# Altium PCB Sitara_Project_Rev_A_PCB.PcbDoc (part 7 of 9)
Units mm, origin at the board's own origin, x right, y up, seen from the top; angles counter-clockwise.
Board outline 120 x 85 mm, 8 copper layers (L1 (Sig), L2 (GND), L3 (PWR), L4 (Sig), L5 (GND), L6 (Sig), L7 (GND), L8 (Sig)), stack 1.188 mm thick; 458 components, 357 nets, 1916 pads, 1164 vias.
Unrouted connection lines stored in the file: 516.
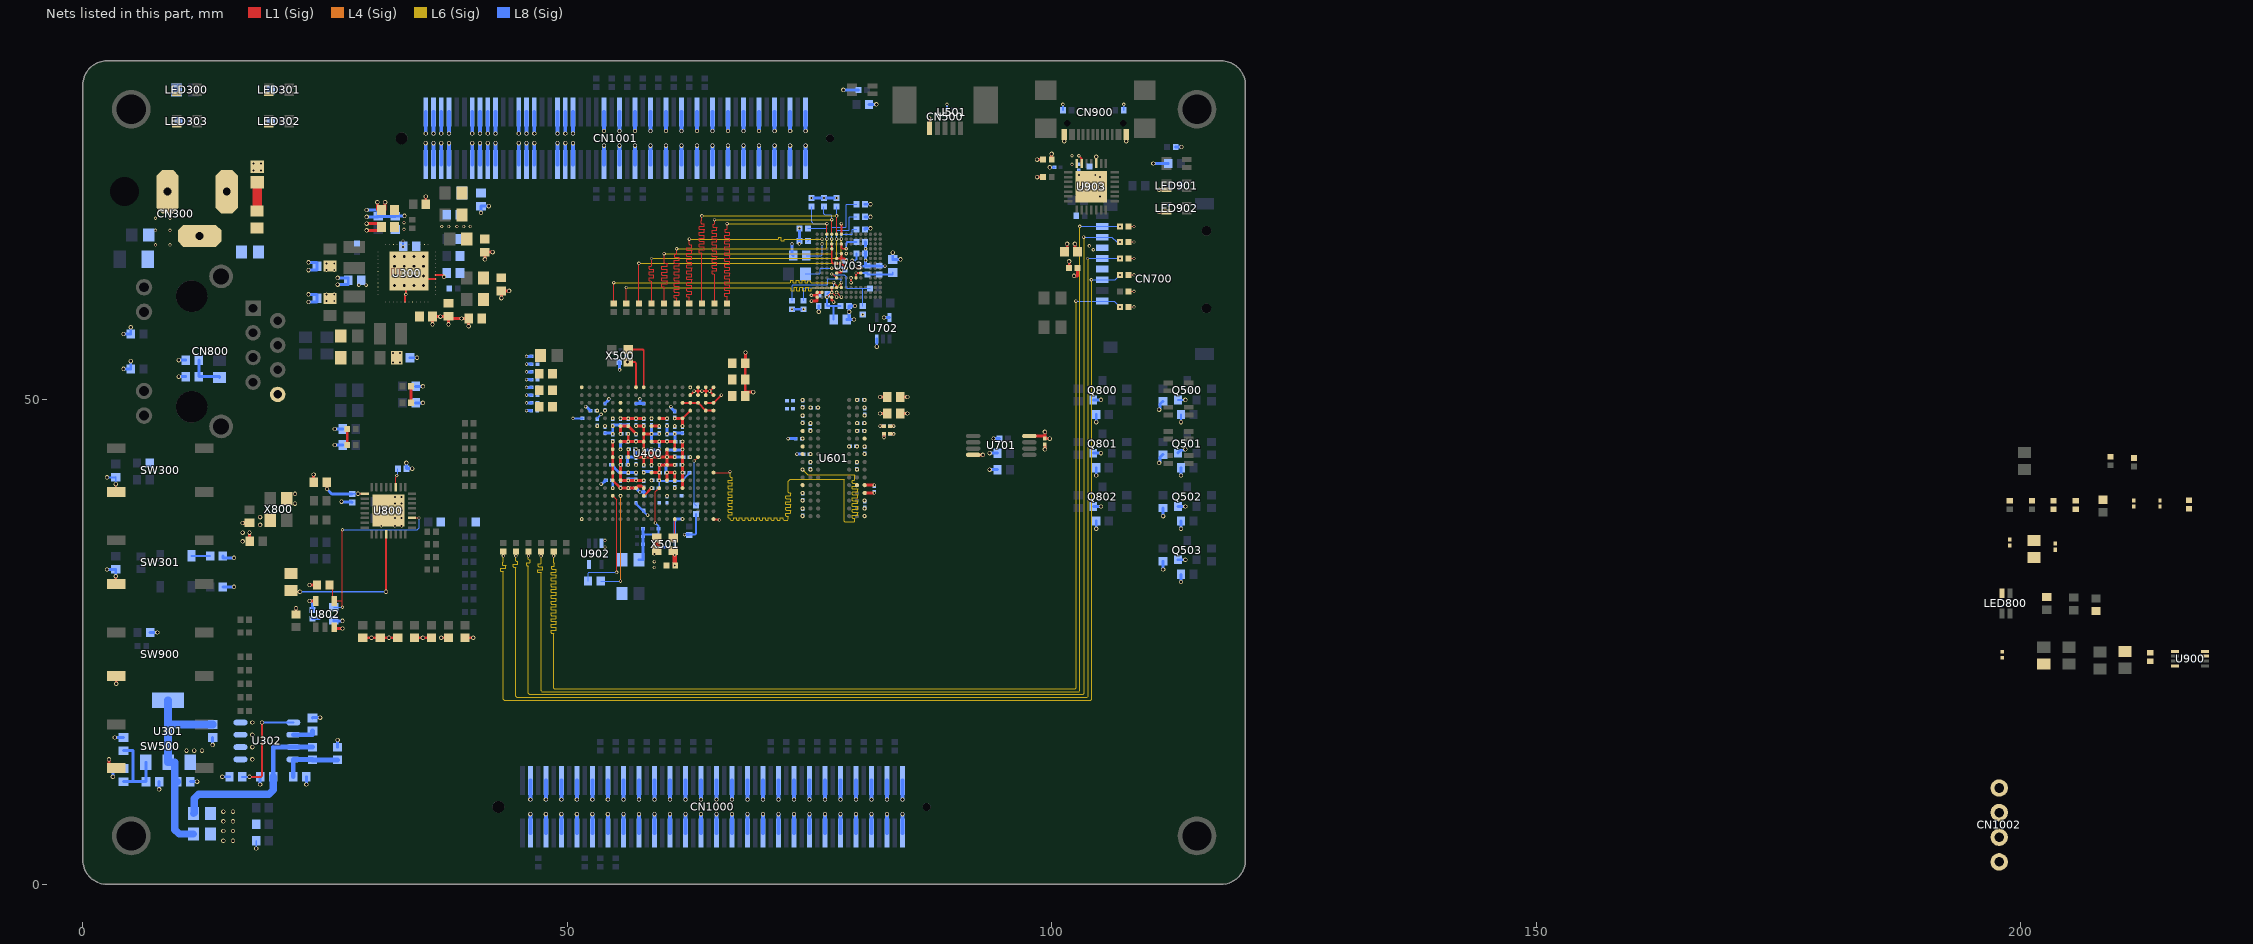
[diagram p10: the nets of this part, all layers, seen from the top]

## Via types
v1: diameter 0.35, hole 0.2, L1 (Sig) to L8 (Sig), tented both sides, 846 vias
v2: diameter 0.45, hole 0.3, L1 (Sig) to L8 (Sig), tented both sides, 302 vias
v3: diameter 0.45/0.45/0.45/0.45/0.45/0.45/0.45/0.45 (per signal layer), hole 0.3, L1 (Sig) to L8 (Sig), tented both sides, 16 vias

## Nets (pads, with @x,y where several pads share a name; then routed paths per layer and width w, separated by ;. In a path a pad name is that pad's centre, name@x,y a point inside that pad or via, vN(x,y) a via of type N, cw(c..) or ccw(c..) an arc to the next point about the centre after c; other vN are vias at no path point) (continued)
DDR_ODT: U400.G1 U601.K1 | length 58.5
  L1 (Sig) w0.1: U400.G1@65.1,42.5 66.7,42.5 v1(66.8,42.6)
  L6 (Sig) w0.1: v1(66.8,42.6) 66.8,42.2 66.8,42.087 66.859,42.029 67.02,42.029 67.05,41.999 67.05,41.759 67.02,41.729 66.644,41.729 66.614,41.699 66.614,41.459 66.644,41.429 67.02,41.429 67.05,41.399 67.05,41.159 67.02,41.129 66.644,41.129 66.614,41.099 66.614,40.859 66.644,40.829 67.02,40.829 67.05,40.799 67.05,40.559 67.02,40.529 66.644,40.529 66.614,40.499 66.614,40.259 66.644,40.229 67.02,40.229 67.05,40.199 67.05,39.959 67.02,39.929 66.644,39.929 66.614,39.899 66.614,39.659 66.644,39.629 67.02,39.629 67.05,39.599 67.05,39.359 67.02,39.329 66.644,39.329 66.614,39.299 66.614,39.059 66.644,39.029 67.02,39.029 67.05,38.999 67.05,38.759 67.02,38.729 66.644,38.729 66.614,38.699 66.614,38.459 66.644,38.429 67.02,38.429 67.05,38.399 67.05,38.159 67.02,38.129 66.644,38.129 66.614,38.099 66.614,37.859 66.644,37.829 66.741,37.829 66.8,37.77 66.8,37.72 66.8,37.659 66.859,37.6 67.005,37.6 67.112,37.6 67.171,37.659 67.171,37.82 67.201,37.85 67.441,37.85 67.471,37.82 67.471,37.607 67.501,37.577 67.741,37.577 67.771,37.607 67.771,37.82 67.801,37.85 68.041,37.85 68.071,37.82 68.071,37.607 68.101,37.577 68.341,37.577 68.371,37.607 68.371,37.82 68.401,37.85 68.641,37.85 68.671,37.82 68.671,37.607 68.701,37.577 68.941,37.577 68.971,37.607 68.971,37.82 69.001,37.85 69.241,37.85 69.271,37.82 69.271,37.607 69.301,37.577 69.541,37.577 69.571,37.607 69.571,37.82 69.601,37.85 69.841,37.85 69.871,37.82 69.871,37.607 69.901,37.577 70.141,37.577 70.171,37.607 70.171,37.82 70.201,37.85 70.441,37.85 70.471,37.82 70.471,37.607 70.501,37.577 70.741,37.577 70.771,37.607 70.771,37.82 70.801,37.85 71.041,37.85 71.071,37.82 71.071,37.607 71.101,37.577 71.341,37.577 71.371,37.607 71.371,37.82 71.401,37.85 71.641,37.85 71.671,37.82 71.671,37.607 71.701,37.577 71.941,37.577 71.971,37.607 71.971,37.82 72.001,37.85 72.241,37.85 72.271,37.82 72.271,37.659 72.329,37.6 72.679,37.6 72.741,37.6 72.8,37.659 72.8,37.9 72.8,37.95 72.741,38.009 72.58,38.009 72.55,38.039 72.55,38.279 72.58,38.309 73.02,38.309 73.05,38.339 73.05,38.579 73.02,38.609 72.58,38.609 72.55,38.639 72.55,38.879 72.58,38.909 73.02,38.909 73.05,38.939 73.05,39.179 73.02,39.209 72.58,39.209 72.55,39.239 72.55,39.479 72.58,39.509 73.02,39.509 73.05,39.539 73.05,39.779 73.02,39.809 72.58,39.809 72.55,39.839 72.55,40.079 72.58,40.109 73.02,40.109 73.05,40.139 73.05,40.379 73.02,40.409 72.859,40.409 72.8,40.467 72.8,40.773 72.8,41.6 72.9,41.7 73,41.8 78.541,41.8 78.6,41.741 78.6,37.459 78.659,37.4 79.6,37.4 79.7,37.5 79.7,37.7 79.7,37.75 79.641,37.809 79.464,37.809 79.434,37.839 79.434,38.079 79.464,38.109 79.965,38.109 79.995,38.139 79.995,38.379 79.965,38.409 79.464,38.409 79.434,38.439 79.434,38.679 79.464,38.709 79.965,38.709 79.995,38.739 79.995,38.979 79.965,39.009 79.464,39.009 79.434,39.039 79.434,39.279 79.464,39.309 79.965,39.309 79.995,39.339 79.995,39.579 79.965,39.609 79.464,39.609 79.434,39.639 79.434,39.879 79.464,39.909 79.965,39.909 79.995,39.939 79.995,40.179 79.965,40.209 79.464,40.209 79.434,40.239 79.434,40.479 79.464,40.509 79.965,40.509 79.995,40.539 79.995,40.779 79.965,40.809 79.464,40.809 79.434,40.839 79.434,41.079 79.464,41.109 79.965,41.109 79.995,41.139 79.995,41.379 79.965,41.409 79.464,41.409 79.434,41.439 79.434,41.679 79.464,41.709 79.641,41.709 79.7,41.767 79.7,41.998 79.7,42.241 79.641,42.3 74.8,42.3 v1(74.3,42.8)
DDR_VREF: C600.1 C601.1 C602.1 C625.2 R602.1 R603.1 U400.J4 U601.H1 U601.M8
  other v1: 62.7,44.1
DDR_VTP: R605.1 U400.J3 | length 5.2
  L1 (Sig) w0.1: v1(63.1,43.7) U400.J3@63.5,44.1
  L8 (Sig) w0.1: v1(63.1,43.7) 63.1,39.3 R605.1@63.3,39.1
DGND: C300.1 C301.1 C302.1 C303.1 C304.2 C305.1 C306.1 C307.1 C308.1 C309.1 C310.1 C311.1 C312.1 C313.1 C314.1 C315.1 C316.1 C317.1 C318.1 C319.1 C320.1 C321.1 C322.1 C323.1 C324.1 C325.1 C326.1 C327.1 C328.1 C329.1 C400.2 C401.2 C402.1 C403.1 C404.1 C405.1 C406.1 C407.1 C408.1 C409.1 C410.1 C411.1 C412.2 C413.2 C414.1 C415.1 C416.1 C417.1 C418.1 C419.1 C420.1 C421.1 C422.1 C423.1 C424.1 C425.1 C426.1 C427.1 C428.1 C429.1 C430.1 C431.1 C432.1 C433.1 C434.1 C435.1 C436.1 C437.1 C438.1 C439.1 C440.1 C441.1 C442.1 C443.1 C444.1 C445.1 C446.1 C447.1 C448.1 C449.1 C450.1 C451.1 C452.1 C453.1 C454.1 C455.1 C456.1 C457.1 C458.1 C459.1 C460.1 C461.1 C462.1 C463.1 C464.1 C465.1 C466.1 C467.1 C468.1 C469.1 C470.1 C471.1 C472.1 C473.1 C500.2 C600.2 C601.2 C602.2 C603.1 C604.1 C605.1 C606.1 C607.1 C608.1 C609.1 C610.1 C611.1 C612.1 C613.1 C614.1 C615.1 C616.1 C617.1 C618.1 C619.1 C620.1 C621.1 C622.1 C623.1 C624.1 C625.1 C700.2 C701.2 C702.2 C703.2 C704.1 C705.1 C706.1 C707.1 C708.1 C709.1 C710.1 C711.1 C712.1 C713.1 C714.1 C800.2 C801.2 C802.2 C803.2 C804.2 C805.1 C806.1 C807.1 C808.1 C809.1 C810.1 C811.1 C812.1 C813.2 C814.2 C900.2 C901.2 C902.1 C903.2 C904.2 C905.2 CN500.5 CN700.6 CN800.8 CN900.A1 CN900.B1 CN1000.3 CN1000.4 CN1000.7 CN1000.8 CN1000.11 CN1000.12 CN1000.15 CN1000.16 CN1000.19 CN1000.20 CN1000.23 CN1000.24 CN1000.27 CN1000.28 CN1000.31 CN1000.32 CN1000.35 CN1000.36 CN1000.39 CN1000.40 CN1000.43 CN1000.44 CN1000.47 CN1000.48 CN1000.51 CN1000.52 CN1000.55 CN1000.56 CN1000.59 CN1000.60 CN1000.63 CN1000.64 CN1000.67 CN1000.68 CN1000.71 CN1000.72 CN1000.75 CN1000.76 CN1000.79 CN1000.80 CN1000.83 CN1000.84 CN1000.87 CN1000.88 CN1000.91 CN1000.92 CN1000.95 CN1000.96 CN1000.99 CN1000.100 CN1001.13 CN1001.14 CN1001.15 CN1001.16 CN1001.17 CN1001.18 CN1001.19 CN1001.20 CN1001.47 CN1001.48 CN1001.51 CN1001.52 CN1001.55 CN1001.56 CN1001.59 CN1001.60 CN1001.63 CN1001.64 CN1001.67 CN1001.68 CN1001.71 CN1001.72 CN1001.75 CN1001.76 CN1001.79 CN1001.80 CN1001.83 CN1001.84 CN1001.87 CN1001.88 CN1001.91 CN1001.92 CN1001.95 CN1001.96 CN1001.99 CN1001.100 CN1002.4 FB400.1 Q500.2 Q501.2 Q502.2 Q503.2 Q800.2 Q801.2 Q802.2 R301.2 R305.2 R306.1 R307.2 R309.2 R318.1 R331.1 R333.1 R334.1 R400.2 R401.1 R519.2 R520.2 R521.2 R535.1 R538.2 R542.2 R547.2 R551.2 R555.2 R601.2 R603.2 R604.2 R605.2 R819.2 R823.1 R824.1 R829.2 R830.2 R831.2 R832.2 R847.2 R849.1 R850.1 R851.2 R853.2 R904.1 R905.1 R906.1 R907.2 SW300.3 SW301.3 SW500.3 SW900.3 U300.30 U300.41 U300.49 U301.1 U302.5 U302.6 U302.7 U302.8 U400.A1 U400.A18 U400.F8 U400.G8 U400.G9 U400.G11 U400.G12 U400.H6 U400.H7 U400.H8 U400.H9 U400.H10 U400.H12 U400.J6 U400.J7 U400.J8 U400.J9 U400.J10 U400.J11 U400.K7 U400.K9 U400.K10 U400.K11 U400.L10 U400.L11 U400.L12 U400.L13 U400.M6 U400.M7 U400.M8 U400.M9 U400.M10 U400.M12 U400.M14 U400.N7 U400.N10 U400.N11 U400.N14 U400.R1 U400.R2 U400.T3 U400.T4 U400.T5 U400.U1 U400.U2 U400.U3 U400.U4 U400.V1 U400.V2 U400.V3 U400.V18 U501.4 U601.A9 U601.B1 U601.B3 U601.B9 U601.D1 U601.D8 U601.E1 U601.E2 U601.E8 U601.F9 U601.G1 U601.G8 U601.G9 U601.J2 U601.J8 U601.M1 U601.M9 U601.P1 U601.P9 U601.T1 U601.T9 U701.4 U702.3 U703.A6 U703.C4 U703.D4 U703.E7 U703.G5 U703.H10 U703.J5 U703.K8 U703.N1 U703.N2 U703.N5 U703.P1 U703.P4 U703.P6 U800.33 U802.3 U900.1 U900.4 U902.3 U903.3 U903.29 X800.2 X800.4 | length 369.9
  L1 (Sig) w0.1: v1(77.8,61.1) v1(78.3,60.6)
  L1 (Sig) w0.2: SW500.3@2.7,12.4 3.1,12 SW500.3@3.45,12 ; SW301.3@3.4,31.05 SW301.3@3.45,31 ; v2(3.4,41.3) 3.4,40.55 SW300.3@3.45,40.5 ; v3(33.175,61.8) 33.35,61.8 v1(33.35,60.9) 33.25,60.9 U300.30@33.25,60.1 ; v3(35.175,62.8) 35.175,62.475 U300.41@36.425,62.475 ; U400.T5@61.9,49.7 61.902,49.702 62.698,49.702 U400.T4@62.7,49.7 U400.T3@63.5,49.7 U400.R2@64.3,48.9 U400.R1@65.1,48.9 ; U400.U4@62.7,50.5 v1(63.1,50.9) 63.5,50.9 ; U400.U3@63.5,50.5 63.5,50.9 ; U400.V3@63.5,51.3 63.5,50.9 ; U400.U2@64.3,50.5 64.3,50.9 ; U400.V2@64.3,51.3 64.3,50.9 ; U400.A1@65.1,37.7 65.138,37.662 65.598,37.662 65.659,37.6 v1(65.7,37.6) ; U400.U1@65.1,50.5 v1(64.7,50.9) ; U400.V1@65.1,51.3 v1(64.7,50.9) ; U703.C4@77.3,66.1 U703.D4@77.3,65.6 77.3,64.217 77.417,64.1 U703.G5@77.8,64.1 77.803,64.097 78.303,64.097 v1(78.8,63.6) ; U703.J5@77.8,63.1 77.829,63.129 78.229,63.129 78.3,63.2 v1(78.3,63.4) ; U703.A6@78.3,67.1 v1(78.3,68.2) ; v1(79.3,62.1) v1(79.3,62.6) ; CN500.5@87.4,78.05 v1(87.4,79.1) ; v2(101.3,76.7) CN900.B1@101.3,77.4 ; U903.3@104.6,74.4 v2(104.6,75.1) ; 63.5,50.9 v1(63.9,50.9) 64.3,50.9 ; 64.3,50.9 v1(64.7,50.9)
  L1 (Sig) w0.25: U703.P4@77.3,60.6 77.319,60.581 77.319,60.308 77.5,60.127 v1(77.5,60.1) ; v1(79.8,63.8) 79.827,63.8 80.008,63.619 80.281,63.619 U703.H10@80.3,63.6 ; C701.2@101.325,65.3 101.6,65.3 v2(101.6,66.1) ; C702.2@101.795,63.6 101.8,63.6 v2(101.8,64.3)
  L1 (Sig) w0.3: SW500.3@2.7,12.4 v2(2.7,12.9) ; SW301.3@3.4,31.05 v2(3.4,31.8) ; v2(3.45,20.7) SW900.3@3.45,21.5 ; v2(16.5,37.3) 17.175,37.3 C806.1@17.2,37.325 ; v2(17.2,36.3) 17.2,35.425 C805.1@17.225,35.4 ; C800.2@23.825,41.5 v2(23.825,42.3) ; U802.3@25.95,26.55 25.95,26.4 v2(26.8,26.4) ; v2(29.3,67.5) 30.525,67.5 30.825,67.8 C314.1@30.825,67.85 30.825,67.9 30.525,68.2 v2(29.3,68.2) ; v2(30.4,70.4) 30.4,69.6 C313.1@30.825,69.6 31.2,69.6 v2(31.2,70.4) ; R829.2@34.25,25.45 v2(35.1,25.45) R830.2@36,25.45 ; R307.2@35.4,70.2 v2(35.4,71) ; v2(36.1,57.8) C319.1@36.1,58.6 v2(36.9,58.6) C320.1@37.75,58.6 ; v2(37.75,57.8) C320.1@37.75,58.6 ; R832.2@39.46,25.45 v2(40.3,25.45) ; v2(39.825,57.6) C328.1@39.825,58.4 v2(39.1,58.4) 37.75,58.4 C320.1@37.75,58.6 ; v2(41.5,64.5) C327.1@41.5,65.25 v2(42.3,65.25) ; v2(43.2,60.5) C329.1@43.2,61.25 v2(44,61.25) ; U400.L13@55.5,45.7 v1(56.3,45.7) ; v1(56.3,46.5) v1(56.3,45.7) ; v1(57.1,44.1) v1(57.9,44.1) ; v1(57.1,47.3) v1(57.9,47.3) U400.M10@57.9,46.5 ; v1(57.9,43.3) v1(57.9,44.1) ; U400.G9@58.7,42.5 v1(59.5,42.5) ; v1(58.7,43.3) v1(58.7,44.1) ; U400.K9@58.7,44.9 v1(58.7,44.1) ; v1(58.7,46.5) U400.M10@57.9,46.5 ; v1(59.5,41.7) v1(59.5,42.5) ; U400.K7@60.3,44.9 v1(60.3,44.1) ; v1(61.1,43.3) U400.H7@60.3,43.3 ; v1(61.1,44.1) v1(60.3,44.1) ; C448.1@68.375,50.4 C448.1@68.375,50.8 ; v2(68.4,54.9) 68.4,53.8 C420.1@68.375,53.8 C449.1@68.375,52.1 C448.1@68.375,50.8 ; v2(69.2,50.8) C448.1@68.375,50.8 ; v1(75.2,60.2) 75.8,60.2 U703.P1@75.8,60.6 75.8,60.85 ; v1(75.2,60.8) 75.8,60.8 75.8,60.85 ; U703.N2@76.3,61.1 U703.N1@75.8,61.1 75.8,60.85 ; U601.M9@80.7,41.2 v1(81.7,41.2) ; C622.1@83.31,46.5 v1(83.7,46.5) ; C623.1@83.31,47.3 v1(83.7,47.3) ; C465.1@84.375,48.6 v2(85.1,48.6) ; C464.1@84.375,50.3 v2(85.1,50.3) ; U701.4@91.9,44.325 v2(92.9,44.325) ; v2(98.5,74.8) C903.2@99.12,74.8 ; v2(99.3,44.9) C700.2@99.3,45.39 ; v2(107.7,76.7) CN900.A1@107.7,77.4 ; v1(56.3,45.7) v1(57.1,45.7) U400.L10@57.9,45.7 ; v1(57.9,44.1) U400.K10@57.9,44.9 U400.L10@57.9,45.7 ; v1(57.9,44.1) v1(58.7,44.1) ; U400.L10@57.9,45.7 U400.M10@57.9,46.5 ; v1(58.7,44.1) v1(59.5,44.1) v1(60.3,44.1) ; v1(59.5,42.5) v1(59.5,43.3) U400.H7@60.3,43.3 ; U400.H7@60.3,43.3 v1(60.3,44.1)
  L8 (Sig) w0.2: v2(2.5,42) 3.4,42 C301.1@3.4,42.025 v2(3.4,41.3) ; C302.1@3.4,32.5 C302.1@3.4,32.525 ; v2(17.9,3.7) R535.1@17.9,4.5 ; v1(50.6,48.1) R521.2@51.575,48.1 ; C403.1@53.1,48.1 v1(53.5,48.5) ; C412.2@57.1,39.38 57.125,39.355 57.125,39.256 v1@58.272,38.11 ; C401.2@57.9,38.59 C401.2@57.9,38.6 ; C404.1@59.42,40.9 59.425,40.9 59.5,40.975 v1(59.5,41.7) 59.541,41.7 59.631,41.61 C410.1@60.3,41.61 60.305,41.615 61.095,41.615 C426.1@61.1,41.62 61.82,41.62 62.51,42.31 62.51,42.425 62.585,42.5 C472.1@62.61,42.5 ; R538.2@62.57,36.09 63.183,36.09 63.3,36.208 R605.2@63.3,38.22 ; v1(78.3,63.4) 78.6,63.4 v1(78.8,63.6) ; U501.4@89.2,80 v1(89.2,80.5) ; v2(99.8,74) C902.1@100.28,74 ; R905.1@101.16,79.9 v1(101.16,80.5) ; v1(102.8,73.2) C905.2@102.8,73.7 ; C904.2@103.9,73.22 v1(104.5,73.22) ; R906.1@107.44,79.9 v1(107.44,80.5) ; Q500.2@113.05,50 v2(113.8,50) ; v2(113.35,47.7) R542.2@113.35,48.5
  L8 (Sig) w0.25: v1(79.8,63.8) 81,63.8 C708.1@81,63.84
  L8 (Sig) w0.3: v2(2.5,32.5) C302.1@3.4,32.5 ; v2(3.1,11.1) 3.1,11.8 3.25,11.95 C306.1@4.2,11.95 ; v2(3.3,15.15) C305.1@4.2,15.15 ; v2(3.4,31.8) C302.1@3.4,32.525 ; v2(4.2,53.2) R850.1@4.95,53.2 v2(4.95,54) ; v2(4.2,56.8) R849.1@4.95,56.8 v2(4.95,57.5) ; v2(7.875,9.8) C307.1@7.875,10.6 ; v2(9.9,52.4) C814.2@10.625,52.4 ; v2(9.9,54.1) C813.2@10.625,54.1 ; C308.1@11.1,10.6 v2(11.8,10.6) ; v2(13.4,14.4) C309.1@13.4,15.15 ; R301.2@14.45,30.7 v2(15.6,30.7) ; R305.2@14.45,33.9 14.45,33.7 v2(15.6,33.7) ; v2(18.3,10.3) C311.1@18.3,11.1 ; v2(23.075,10.3) C312.1@23.075,11.1 ; v2(23.3,60.1) 24.175,60.1 C324.1@24.175,60.5 24.175,60.9 v2(23.3,60.9) ; v2(23.3,63.4) 24.175,63.4 C323.1@24.175,63.8 24.175,64.2 v2(23.3,64.2) ; C310.1@23.7,17.175 23.725,17.2 v2(24.5,17.2) ; C808.1@23.7,27.42 24.4,27.42 v2(24.4,27.6) ; C807.1@25.9,27.25 25.9,27.2 v2(26.8,27.2) ; v2(26,45.35) C811.1@26.825,45.35 ; v2(26,47) C812.1@26.825,47 ; R333.1@26.3,14.15 v2(26.3,14.9) ; v2(26.3,61.9) 27.4,61.9 C317.1@27.4,62.35 27.4,62.6 v2(26.3,62.6) ; v2(26.7,39.5) 26.729,39.471 27.749,39.471 C801.2@27.8,39.42 ; v2(29.3,68.9) 30.45,68.9 30.45,69.6 v2(29.3,69.6) ; C322.1@30.5,68.95 C315.1@32.25,68.95 32.25,69 v2(33.2,69) ; v2(33.4,43.5) C802.2@33.4,42.9 v2(34,42.9) ; C325.1@33.76,54.35 v2(34.5,54.35) ; C809.1@34.35,49.7 v2(35.1,49.7) ; C810.1@34.35,51.4 v2(35.1,51.4) ; v2(41.1,69.3) C326.1@41.1,70 v2(41.9,70) ; v1(45.8,48.9) C429.1@46.29,48.9 ; v1(45.8,49.7) C430.1@46.3,49.7 ; v1(45.8,50.5) C431.1@46.3,50.5 ; v1(45.8,51.3) C432.1@46.3,51.3 ; v1(45.8,52.1) C433.1@46.3,52.1 ; v1(45.8,52.9) C434.1@46.3,52.9 ; v1(45.8,53.7) C435.1@46.3,53.7 ; v1(45.8,54.5) C408.1@46.3,54.5 ; v1(51.9,49.3) 51.91,49.29 51.975,49.29 52.365,48.9 C402.1@52.4,48.9 ; v1(53.5,41.3) 53.51,41.31 53.575,41.31 53.965,41.7 C473.1@53.99,41.7 ; C442.1@53.9,46.6 54.535,46.6 54.7,46.435 C443.1@54.7,46.41 ; C436.1@53.9,49.61 53.9,49.635 54.29,50.025 54.29,50.09 v1(54.3,50.1) ; C407.1@54.51,43.3 54.535,43.3 55.335,42.5 55.5,42.5 ; v1(54.7,46.5) v1(54.7,47.3) 54.8,47.4 C441.1@55.5,47.4 C440.1@56.3,47.4 ; R400.2@55.36,53.9 55.39,53.87 55.39,53.11 v1(55.4,53.1) ; C444.1@55.5,41.6 55.5,42.5 ; v1(56.3,43.3) 56.2,43.4 C415.1@56.2,44.1 v1(57.1,44.1) v1(57.1,44.9) ; C445.1@57,40.9 57.025,40.875 57.125,40.875 v1@57.49,40.51 ; v1(57.1,42.5) v1(56.3,42.5) 55.5,42.5 ; C405.1@57.1,49.61 57.5,49.61 ; v1(57.5,40.5) 57.9,40.5 ; v1(57.5,50.1) 57.5,49.61 ; C417.1@57.9,40.99 57.9,40.5 ; C406.1@57.9,49.61 57.5,49.61 ; C413.2@57.99,40.1 57.99,40.5 57.9,40.5 ; C423.1@58.7,47.4 v1(58.7,46.5) ; C452.1@58.8,45.7 58.775,45.7 58.75,45.725 58.75,45.75 58.7,45.8 v1(58.7,46.5) ; v1(59.5,46.5) v1(58.7,46.5) ; v1(60.3,47.3) v1(60.3,46.5) v1(61.1,46.5) ; v1(60.7,49.3) 60.71,49.29 60.71,49.19 61.05,48.85 61.075,48.85 61.1,48.825 C437.1@61.1,48.8 ; v1(61.1,44.1) C625.1@61.99,44.1 ; C469.1@61.19,45.7 61.165,45.7 61.14,45.725 61.14,46.325 61.1,46.365 v1(61.1,46.5) ; C446.1@61.9,46.6 61.2,46.6 v1(61.1,46.5) ; v1(62.1,36.1) 62.11,36.09 R538.2@62.57,36.09 ; v1(72.8,46) C618.1@73.59,46 ; v1(73.2,66.1) 73.2,65.025 C709.1@73.325,64.9 ; v1(73.7,44.4) C619.1@74.39,44.4 ; v2(75.96,59.1) C713.1@75.96,59.7 ; v2(78.5,82) C500.2@80.06,82 ; v2(79.6,58.3) C710.1@78.85,58.3 79.1,58.3 v2(79.1,59.1) 79.1,59.7 C712.1@79.08,59.7 v2(79.7,59.7) ; C707.1@80.74,65.1 C707.1@80.8,65.1 ; C711.1@80.74,66.3 80.8,66.3 v1(80.8,65.6) C707.1@80.8,65.1 ; R520.2@81.15,80.5 v2(81.9,80.5) ; v2(81.95,55.5) U702.3@81.95,56.3 ; v1(82.8,63.8) 82.2,63.8 C706.1@82.2,63.84 C708.1@81,63.84 80.8,63.84 v1(80.8,64.4) C707.1@80.8,65.1 ; C614.1@83.31,46.5 v1(83.7,46.5) ; C621.1@83.31,47.3 v1(83.7,47.3) ; v2(83.6,65.2) C704.1@83.6,64.5 v2(84.4,64.5) ; Q802.2@104.3,39 v2(105.1,39) ; Q801.2@104.3,44.5 v2(105.1,44.5) ; Q800.2@104.3,50 v2(105.1,50) ; v2(104.6,36.7) R853.2@104.6,37.5 ; v2(104.6,42.2) R851.2@104.6,43 ; v2(104.6,47.7) R847.2@104.6,48.5 ; v2(110.5,74.4) R907.2@112.038,74.4 ; C901.2@112.8,76.1 v2(113.4,76.1) ; Q503.2@113.05,33.5 v2(113.8,33.5) ; Q502.2@113.05,39 v2(113.8,39) ; Q501.2@113.05,44.5 113.05,44.55 113.3,44.8 113.659,44.8 113.759,44.9 v2(113.8,44.9) ; v2(113.35,31.2) R555.2@113.35,32 ; v2(113.35,36.7) R551.2@113.35,37.5 ; v2(113.35,42.2) R547.2@113.35,43
  L8 (Sig) w0.4: CN1001.14@40.2,74.3 v2(40.2,76.5) ; v2(40.2,77.5) CN1001.13@40.2,79.7 ; CN1001.16@41,74.3 v2(41,76.5) ; v2(41,77.5) CN1001.15@41,79.7 ; CN1001.18@41.8,74.3 v2(41.8,76.5) ; v2(41.8,77.5) CN1001.17@41.8,79.7 ; CN1001.20@42.6,74.3 v2(42.6,76.5) ; v2(42.6,77.5) CN1001.19@42.6,79.7 ; CN1000.4@46.2,5.3 v2(46.2,7.25) ; v2(46.2,8.75) CN1000.3@46.2,10.7 ; CN1000.8@47.8,5.3 v2(47.8,7.25) ; v2(47.8,8.75) CN1000.7@47.8,10.7 ; CN1000.12@49.4,5.3 v2(49.4,7.25) ; v2(49.4,8.75) CN1000.11@49.4,10.7 ; CN1000.16@51,5.3 v2(51,7.25) ; v2(51,8.75) CN1000.15@51,10.7 ; CN1000.20@52.6,5.3 v2(52.6,7.25) ; v2(52.6,8.75) CN1000.19@52.6,10.7 ; CN1001.48@53.8,74.3 v2(53.8,76.25) ; v2(53.8,77.75) CN1001.47@53.8,79.7 ; CN1000.24@54.2,5.3 v2(54.2,7.25) ; v2(54.2,8.75) CN1000.23@54.2,10.7 ; CN1001.52@55.4,74.3 v2(55.4,76.25) ; v2(55.4,77.75) CN1001.51@55.4,79.7 ; CN1000.28@55.8,5.3 v2(55.8,7.25) ; v2(55.8,8.75) CN1000.27@55.8,10.7 ; CN1001.56@57,74.3 v2(57,76.25) ; v2(57,77.75) CN1001.55@57,79.7 ; CN1000.32@57.4,5.3 v2(57.4,7.25) ; v2(57.4,8.75) CN1000.31@57.4,10.7 ; CN1001.60@58.6,74.3 v2(58.6,76.25) ; v2(58.6,77.75) CN1001.59@58.6,79.7 ; CN1000.36@59,5.3 v2(59,7.25) ; v2(59,8.75) CN1000.35@59,10.7 ; CN1001.64@60.2,74.3 v2(60.2,76.25) ; v2(60.2,77.75) CN1001.63@60.2,79.7 ; CN1000.40@60.6,5.3 v2(60.6,7.25) ; v2(60.6,8.75) CN1000.39@60.6,10.7 ; CN1001.68@61.8,74.3 v2(61.8,76.25) ; v2(61.8,77.75) CN1001.67@61.8,79.7 ; CN1000.44@62.2,5.3 v2(62.2,7.25) ; v2(62.2,8.75) CN1000.43@62.2,10.7 ; CN1001.72@63.4,74.3 v2(63.4,76.25) ; v2(63.4,77.75) CN1001.71@63.4,79.7 ; CN1000.48@63.8,5.3 v2(63.8,7.25) ; v2(63.8,8.75) CN1000.47@63.8,10.7 ; CN1001.76@65,74.3 v2(65,76.25) ; v2(65,77.75) CN1001.75@65,79.7 ; CN1000.52@65.4,5.3 v2(65.4,7.25) ; v2(65.4,8.75) CN1000.51@65.4,10.7 ; CN1001.80@66.6,74.3 v2(66.6,76.25) ; v2(66.6,77.75) CN1001.79@66.6,79.7 ; CN1000.56@67,5.3 v2(67,7.25) ; v2(67,8.75) CN1000.55@67,10.7 ; CN1001.84@68.2,74.3 v2(68.2,76.25) ; v2(68.2,77.75) CN1001.83@68.2,79.7 ; CN1000.60@68.6,5.3 v2(68.6,7.25) ; v2(68.6,8.75) CN1000.59@68.6,10.7 ; CN1001.88@69.8,74.3 v2(69.8,76.25) ; v2(69.8,77.75) CN1001.87@69.8,79.7 ; CN1000.64@70.2,5.3 v2(70.2,7.25) ; v2(70.2,8.75) CN1000.63@70.2,10.7 ; CN1001.92@71.4,74.3 v2(71.4,76.25) ; v2(71.4,77.75) CN1001.91@71.4,79.7 ; CN1000.68@71.8,5.3 v2(71.8,7.25) ; v2(71.8,8.75) CN1000.67@71.8,10.7 ; CN1001.96@73,74.3 v2(73,76.25) ; v2(73,77.75) CN1001.95@73,79.7 ; CN1000.72@73.4,5.3 v2(73.4,7.25) ; v2(73.4,8.75) CN1000.71@73.4,10.7 ; CN1001.100@74.6,74.3 v2(74.6,76.25) ; v2(74.6,77.75) CN1001.99@74.6,79.7 ; CN1000.76@75,5.3 v2(75,7.25) ; v2(75,8.75) CN1000.75@75,10.7 ; CN1000.80@76.6,5.3 v2(76.6,7.25) ; v2(76.6,8.75) CN1000.79@76.6,10.7 ; CN1000.84@78.2,5.3 v2(78.2,7.25) ; v2(78.2,8.75) CN1000.83@78.2,10.7 ; CN1000.88@79.8,5.3 v2(79.8,7.25) ; v2(79.8,8.75) CN1000.87@79.8,10.7 ; CN1000.92@81.4,5.3 v2(81.4,7.25) ; v2(81.4,8.75) CN1000.91@81.4,10.7 ; CN1000.96@83,5.3 v2(83,7.25) ; v2(83,8.75) CN1000.95@83,10.7 ; CN1000.100@84.6,5.3 v2(84.6,7.25) ; v2(84.6,8.75) CN1000.99@84.6,10.7
  other v1: 59,32.7 59,33.3 53.9,34.1 53.9,34.8 53.9,35.5 30.8,37 32.2,37 32.9,37 51.5,37.7 32.2,37.8 32.9,37.8 74.3,38 80.7,38 58.3,38.1 30.8,38.6 31.5,38.6 32.2,38.6 32.9,38.6 32.2,39.3 32.9,39.3 74.3,39.6 80.7,39.6 32.2,40 32.9,40 75.1,43.6 79.9,43.6 79.9,45.2 80.7,45.2 75.1,46.8 79.9,46.8 74.3,47.6 79.9,47.6 74.3,49.2 75.9,49.2 80.7,49.2 80.7,50 78.8,65.1 104.3,65.5 103.9,65.9 38.6,67.9 39.3,67.9 40,67.9 105,71 103,72 104,72 105,72 105,73 17.6,73.7 18.4,73.7 17.6,74.4 18.4,74.4
  other v2: 17.5,12.895 10.7,13.8 11.5,13.8 12.3,13.8 17.5,14.165 17.5,15.435 17.5,16.705 16.5,35.4 16.5,36.3 18.3,37.1 18.3,37.9 21.9,39.3 21.9,40.3
  other v3: 32.175,61.8 34.175,61.8 35.175,61.8 32.175,62.8 33.175,62.8 34.175,62.8 32.175,63.8 33.175,63.8 34.175,63.8 35.175,63.8 32.175,64.8 33.175,64.8 34.175,64.8 35.175,64.8
DP1.1V_CORE: C325.2 C448.2 C449.2 C450.2 C451.2 C452.2 C453.2 C454.2 C455.2 C456.2 C457.2 C458.2 C459.2 C460.2 C461.2 C462.2 C463.2 R312.2 U400.F6 U400.F7 U400.G6 U400.G7 U400.G10 U400.H11 U400.J12 U400.K6 U400.K8 U400.K12 U400.L6 U400.L7 U400.L8 U400.L9 U400.M11 U400.M13 U400.N8 U400.N9 U400.N12 U400.N13 | length 14
  L1 (Sig) w0.3: v1(55.5,46.5) U400.N13@55.5,47.3 U400.N12@56.3,47.3 v1(57.1,46.5) ; U400.J12@56.3,44.1 v1(56.3,44.9) ; U400.L9@58.7,45.7 v1(59.5,45.7) v1(60.3,45.7) U400.L6@61.1,45.7 U400.K6@61.1,44.9 ; U400.N9@58.7,47.3 v1(59.5,47.3) ; U400.F7@60.3,41.7 v1(60.3,42.5) v1(61.1,42.5) U400.F6@61.1,41.7
  L8 (Sig) w0.3: v1(57.9,42.5) 57.99,42.59 C460.2@58.7,42.59 ; C457.2@57.9,44.81 57.905,44.815 58.695,44.815 C459.2@58.7,44.82 59.42,44.82 v1(59.5,44.9) v1(59.5,45.7) ; C462.2@60.2,43.3 60.2,42.6 v1(60.3,42.5)
  other v1: 57.1,43.3 32,53.85 32.75,53.85 32,54.85 32.75,54.85
DP1.1V_MPU: C324.2 C414.2 C415.2 C416.2 C417.2 C418.2 C419.2 R311.2 U400.F10 U400.F11 U400.F12 U400.F13 U400.G13 U400.H13 U400.J13 | length 5.7
  L1 (Sig) w0.3: v1(55.5,44.1) v1(55.5,43.3) U400.G13@55.5,42.5 U400.F13@55.5,41.7 v1(56.3,41.7) v1(57.1,41.7) v1(57.9,41.7)
  L8 (Sig) w0.3: C418.2@56.289,41.817 56.983,41.817 v1(57.1,41.7)
  other v1: 25.15,60.2 25.95,60.2 25.15,60.9 25.95,60.9
DP1.5V_DDR: C323.2 C464.2 C465.2 C466.2 C467.2 C468.2 C469.2 C470.2 C471.2 C472.2 C603.2 C604.2 C605.2 C606.2 C607.2 C608.2 C609.2 C610.2 C611.2 C612.2 C613.2 C614.2 C615.2 C616.2 C617.2 C618.2 C619.2 C620.2 C621.2 C622.2 C623.2 C624.2 R310.2 R600.2 R602.2 U400.E5 U400.F5 U400.G5 U400.H5 U400.J5 U400.K5 U400.L5 U601.A1 U601.A8 U601.B2 U601.C1 U601.C9 U601.D2 U601.D9 U601.E9 U601.F1 U601.G7 U601.H2 U601.H9 U601.K2 U601.K8 U601.N1 U601.N9 U601.R1 U601.R9 | length 10.5
  L1 (Sig) w0.3: U400.E5@61.9,40.9 U400.F5@61.9,41.7 v1(61.9,42.5) v1(61.9,43.3) U400.J5@61.9,44.1 v1(61.9,44.9) v1(61.9,45.7) ; U601.N9@80.7,40.4 v1(81.7,40.4) ; v1(82.3,47.3) C623.2@82.69,47.3 ; v2(82.3,48.6) C465.2@83.025,48.6 ; v2(82.3,50.3) C464.2@83.025,50.3 ; C622.2@82.69,46.5 82.7,46.5 v1(82.7,46.1)
  L8 (Sig) w0.3: C471.2@60.3,44.81 C468.2@61.1,44.81 61.796,44.81 61.886,44.9 v1(61.9,44.9) ; v1(82.3,47.3) C621.2@82.69,47.3 ; C614.2@82.69,46.5 82.69,46.1 v1(82.7,46.1)
  other v1: 74.3,38.8 80.7,38.8 74.3,40.4 75.1,42.8 79.9,42.8 75.1,44.4 80.7,44.4 79.1,45.2 74.3,46 80.7,46.8 75.1,47.6 80.7,47.6 74.3,48.4 80.7,48.4 75.1,49.2 74.3,50 79.9,50 25.15,63.4 25.95,63.4 25.15,64.1 25.95,64.1
DP1.8V_VDDS: C420.2 C421.2 C422.2 C423.2 C424.2 C425.2 C426.2 C473.2 R315.2 U400.E6 U400.E14 U400.F9 U400.K13 U400.N6 U400.P9 U400.P14 | length 1.7
  L8 (Sig) w0.3: C473.2@54.61,41.7 54.635,41.7 54.66,41.675 54.66,41.65 54.7,41.61 v1(54.7,40.9) ; v1(55.5,44.9) 55.5,45.62 55.53,45.65 55.53,45.675 55.555,45.7 C421.2@55.58,45.7
  other v1: 61.1,40.9 58.7,41.7 61.1,47.3 54.7,48.1 58.7,48.1
DP1.8V_VIO: R313.2 U300.18 U902.5
DP1.8V_VRTC: C326.2 C411.2 C505.2 R314.2 R327.2 U400.D7 X501.1 X501.4 | length 1.3
  L1 (Sig) w0.8: X501.1@59.25,34.45 X501.4@59.25,35.75
  other v1: 59,34.1 59,35.4 60.3,40.1
DP1.8VS: C328.2 C402.2 C403.2 C404.2 C447.2 FB401.1 FB402.1 R317.2 R717.2 U400.D10 U400.E9 U400.N16 U400.P7 U400.P8 U400.R16 | length 1.9
  L1 (Sig) w0.25: U400.D10@57.9,40.1 v1(58.7,40.9)
  L1 (Sig) w0.3: U400.P8@59.5,48.1 v1(60.3,48.1)
  other v1: 53.1,47.3 53.1,48.9
DP1.8VS_eMMC: C703.1 C710.2 C711.2 C712.2 C713.2 C714.2 R717.1 R720.2 R721.2 R722.2 R726.2 R727.2 R728.2 R729.2 R730.2 R731.2 R732.2 R733.2 U702.5 U703.C6 U703.M4 U703.N4 U703.P3 U703.P5 | length 16.5
  L1 (Sig) w0.1: v1(76.8,60.6) v1(77.3,61.1) v1(77.8,60.6)
  L1 (Sig) w0.2: v1(77.3,61.1) U703.M4@77.3,61.6 ; U703.C6@78.3,66.1 78.3,65.717 78.417,65.6 v1(78.8,65.6)
  L8 (Sig) w0.2: v1(76.8,60.6) 76.8,59.74 C713.2@76.84,59.7 77.331,59.7 77.333,59.698 77.5,59.698 ; C714.2@76.84,60.9 77.04,61.1 v1(77.3,61.1) ; C710.2@77.5,58.3 77.5,59.698 ; C712.2@78.2,59.7 77.669,59.7 77.667,59.698 77.5,59.698 ; v1(78.8,65.6) 78.8,66.183 78.917,66.3 C711.2@79.86,66.3
  L8 (Sig) w0.3: v1(73.2,59.36) v1(74.4,59.36) ; v1(73.96,66.1) R729.2@73.96,66.4 v1(73.96,67.7) ; v1(75.2,70.84) v1(76.5,70.84) v1(77.8,70.84) ; R733.2@80.74,67.6 80.74,67.7 v2(81.3,67.7) ; R732.2@80.74,68.9 v2(81.3,68.9) ; R731.2@80.74,70.2 v2(81.3,70.2) ; v2(82.7,58.5) U702.5@83.25,58.5
  other v1: 80.5,58.8
DP3.3VS_A: C329.2 C408.2 C427.2 C428.2 C429.2 C430.2 C431.2 C432.2 C433.2 C434.2 C435.2 C436.2 C437.2 C438.2 C439.2 C440.2 C441.2 C442.2 C443.2 C444.2 C445.2 C446.2 C700.1 LED800.4 R319.2 R320.2 R321.2 R328.2 R335.2 R514.2 R539.1 R546.1 R549.1 R554.1 R700.2 R701.2 R702.2 R908.2 U400.E10 U400.E11 U400.E12 U400.E13 U400.F14 U400.G14 U400.H14 U400.J14 U400.K14 U400.L14 U400.N5 U400.N15 U400.P5 U400.P6 U400.P10 U400.P11 U400.P12 U400.P13 U400.R4 U400.R15 U400.T1 U400.T2 U400.V4 U701.8 | length 25.1
  L1 (Sig) w0.2: U400.P5@61.9,48.1 U400.R4@62.7,48.9 ; U400.T2@64.3,49.7 U400.T1@65.1,49.7 v1(65.9,50.5)
  L1 (Sig) w0.25: U400.F14@54.7,41.7 v1(55.5,40.9)
  L1 (Sig) w0.3: U400.F14@54.7,41.7 U400.G14@54.7,42.5 U400.H14@54.7,43.3 U400.J14@54.7,44.1 U400.K14@54.7,44.9 v1(54.7,45.7) ; v1(55.5,40.9) v1(56.3,40.9) 57.126,40.9 57.326,41.1 57.673,41.1 57.873,40.9 U400.E10@57.9,40.9 ; v1(55.5,48.1) v1(56.3,48.1) v1(57.1,48.1) v1(57.9,48.1) ; v1(61.1,48.1) U400.P5@61.9,48.1 v1(61.9,47.3) ; U701.8@97.7,46.275 99.3,46.275 ; C700.1@99.3,46 v2(99.8,46) ; C700.1@99.3,46.01 99.3,46.275 ; v2(99.3,46.7) 99.3,46.275
  L8 (Sig) w0.3: R908.2@6.95,26 v2(7.7,26) ; v2(14.4,11.1) R335.2@15.15,11.1 ; v2(93.6,42.8) R701.2@94.4,42.8 ; v2(93.6,44.5) R700.2@94.4,44.5 ; v2(94,46) R702.2@94.62,46 ; v2(111.1,43.5) 111.1,43.541 111.175,43.616 111.175,44.075 111.45,44.35 R546.1@111.5,44.35 ; v2(111.1,49) 111.1,49.04 111.175,49.116 111.175,49.575 111.45,49.85 R539.1@111.5,49.85 ; v2(111.5,32.5) R554.1@111.5,33.35 ; v2(111.5,38) R549.1@111.5,38.85
  other v1: 53.9,47.3 53.9,48.9 62.7,51.3
DP3.3VS_AMS: C308.2 C309.2 CN1001.25 CN1001.26 CN1001.27 CN1001.28 CN1001.29 CN1001.30 LED301.4 R337.1 U301.2 U301.4 | length 34.2
  L8 (Sig) w0.4: CN1001.26@45,74.3 v2(45,76.5) ; v2(45,77.5) CN1001.25@45,79.7 ; CN1001.28@45.8,74.3 v2(45.8,76.5) ; v2(45.8,77.5) CN1001.27@45.8,79.7 ; CN1001.30@46.6,74.3 v2(46.6,76.5) ; v2(46.6,77.5) CN1001.29@46.6,79.7
  L8 (Sig) w0.75: U301.2@8.8,12.6 9.5,12.6 C308.2@9.5,10.6 ; C308.2@9.75,10.6 C308.2@9.5,10.6 ; R337.1@11.425,5.2 9.939,5.2 9.5,5.639 C308.2@9.5,10.6
  L8 (Sig) w0.8: U301.2@8.8,12.6 8.8,16.5 ; U301.4@8.8,19 8.8,16.5 ; C309.2@13.4,16.5 8.8,16.5
DP3.3VS_B: C701.1 C702.1 C704.2 C705.2 C706.2 C707.2 C708.2 C808.2 C900.1 C903.1 C904.1 C905.1 CN700.4 CN1002.1 FB800.1 LED901.4 LED902.4 R336.2 R337.2 R518.2 R703.2 R704.2 R705.2 R706.2 R707.2 R708.2 R709.2 R825.2 R826.2 R827.2 R828.2 R834.2 R837.2 R909.1 U703.E6 U703.F5 U703.J10 U703.K9 U800.12 U802.5 U900.7 U900.8 U903.6 U903.7 | length 40.6
  L1 (Sig) w0.1: R708.2@107.94,59.6 v1(108.5,59.6) ; R709.2@107.94,61.2 v1(108.5,61.2) ; R705.2@107.94,62.9 v1(108.5,62.9) ; R704.2@107.94,64.6 v1(108.5,64.6) ; R706.2@107.94,66.3 v1(108.5,66.3) ; R707.2@107.94,67.899 R707.2@107.94,67.899 v1(108.5,67.9)
  L1 (Sig) w0.2: FB800.1@21.5,30.325 21.5,30.2 v2(22.4,30.2) ; v2(31.3,30.2) U800.12@31.3,36.13 ; U703.F5@77.8,64.6 78.3,64.6 ; U703.E6@78.3,65.1 78.3,64.6 ; v1(78.8,64.4) 78.8,64.408 78.608,64.6 78.3,64.6 ; U703.K9@79.8,62.6 v1(79.8,63.1) U703.J10@80.3,63.1 ; v1(102.8,75.2) 103.075,74.924 103.075,74.425 U903.6@103.1,74.4
  L1 (Sig) w0.3: R837.2@22,27.85 v2(22,28.5) ; v2(23.4,29.25) U802.5@24.05,29.25 ; v2(23.4,30.9) R834.2@24.162,30.9 ; R826.2@28.9,25.45 R825.2@30.7,25.45 R828.2@32.5,25.45 ; v2(37,25.45) R827.2@37.75,25.45 ; v2(98.5,73) R909.1@99.12,73 ; C903.1@100,74.8 v2(100,75.4) ; v2(102.3,62.8) 102.675,62.8 C702.1@102.675,63.6 ; v2(102.4,66.1) 102.4,65.3 C701.1@102.675,65.3 ; v2(111.1,69.4) LED902.4@111.85,69.4 ; v2(111.1,71.7) LED901.4@111.85,71.7
  L8 (Sig) w0.2: v2(22.4,30.2) v2(31.3,30.2) ; v1(79.4,64.4) 79.743,64.4 79.86,64.517 C707.2@79.86,65.1 ; v1(79.8,63.1) 81,63.1 C708.2@81,62.96 C706.2@82.2,62.96 83.6,62.96 C704.2@83.6,63.15
  L8 (Sig) w0.3: v2(23.4,29.25) 23.7,29.25 C808.2@23.7,28.3
  other v1: 102.1,74.32 102.1,75.2
  other v2: 14.5,4.5 15.5,4.5 14.5,5.5 15.5,5.5 14.5,6.5 15.5,6.5 14.5,7.5 15.5,7.5 29.8,25.45 31.6,25.45
DP3.3VS_C: C327.2 LED303.4 R316.2
DP3.3VS_MIC: C311.2 CN1001.35 CN1001.36 CN1001.37 CN1001.38 CN1001.39 CN1001.40 LED302.4 R326.2 R336.1 U302.3 | length 31.8
  L8 (Sig) w0.4: CN1001.36@49,74.3 v2(49,76.5) ; v2(49,77.5) CN1001.35@49,79.7 ; CN1001.38@49.8,74.3 v2(49.8,76.5) ; v2(49.8,77.5) CN1001.37@49.8,79.7 ; CN1001.40@50.6,74.3 v2(50.6,76.5) ; v2(50.6,77.5) CN1001.39@50.6,79.7
  L8 (Sig) w0.5: C311.2@19.65,11.1 19.65,14.165 U302.3@21.725,14.165 23.7,14.165 R326.2@23.7,14.15
  L8 (Sig) w0.75: R336.1@11.425,7.3 11.505,7.38 11.505,8.861 11.945,9.3 19.211,9.3 19.65,9.739 C311.2@19.65,11.1
DP3.3VS_PHY: C800.1 C801.1 C802.1 C813.1 C814.1 FB800.2 R836.2 R839.2 R840.2 R841.2 R842.2 U800.1 U800.27 | length 14.1
  L1 (Sig) w0.1: U800.27@32.3,41 32.3,42.032 32.4,42.132 v1(32.4,42.2)
  L1 (Sig) w0.2: v2(28.4,40.315) U800.1@29.115,40.315
  L1 (Sig) w0.3: C800.1@25.175,41.5 25.2,41.475 v2(25.2,40.8) ; R841.2@27.295,45.35 R842.2@27.295,47 ; R839.2@33.88,49.7 R840.2@33.88,51.4
  L8 (Sig) w0.1: v1(32.4,42.2) 32.4,42.268 32.52,42.388 C802.1@32.52,42.9
  L8 (Sig) w0.2: C801.1@27.8,40.3 27.8,40.315 v2(28.4,40.315)
  L8 (Sig) w0.3: C813.1@11.975,54.1 C814.1@11.975,52.4 14.1,52.4 R836.2@14.1,52.325 ; v2(25.2,40.8) 25.7,40.3 C801.1@27.8,40.3
DP5VS: C305.2 C306.2 C307.2 C310.2 C316.2 C317.2 C318.2 C319.2 C320.2 C321.2 U300.2 U300.7 U300.8 U300.21 U300.22 U300.32 U300.39 U300.42 U301.3 U302.2 | length 12.4
  L1 (Sig) w0.2: U300.42@36.425,62.875 37.108,62.875 v2(37.282,62.7)
  L8 (Sig) w0.2: v1(33.05,65.8) v1(33.05,66.4)
  L8 (Sig) w0.3: C306.2@4.2,10.6 5.2,10.6 ; C305.2@4.2,13.8 5.2,13.8 5.2,10.6 ; U301.3@6.5,12.6 6.525,12.6 C307.2@6.525,10.6 5.2,10.6
  L8 (Sig) w0.5: U302.2@21.725,15.435 23.7,15.435 C310.2@23.7,15.825
  other v1: 28.5,61.85 29.25,61.85 37.05,67.9 37.75,67.9
eMMC_CLK: R719.1 R720.1 U703.M6 | length 34.7
  L1 (Sig) w0.1: R719.1@56.1,59.94 v1(56.1,61.6) ; U703.M6@78.3,61.6 v1(78.3,62.1)
  L6 (Sig) w0.1: v1(56.1,61.6) 72.702,61.6 73.052,61.6 73.11,61.541 73.11,61.27 73.125,61.255 73.395,61.255 73.41,61.27 73.41,61.592 73.425,61.607 73.695,61.607 73.71,61.592 73.71,61.27 73.725,61.255 73.995,61.255 74.01,61.27 74.01,61.592 74.025,61.607 74.295,61.607 74.31,61.592 74.31,61.27 74.325,61.255 74.595,61.255 74.61,61.27 74.61,61.592 74.625,61.607 74.895,61.607 74.91,61.592 74.91,61.279 74.925,61.264 75.195,61.264 75.21,61.279 75.21,61.541 75.269,61.6 75.728,61.6 77.8,61.6 v1(78.3,62.1)
  L8 (Sig) w0.1: R720.1@73.2,60.24 73.2,61.8 73.3,61.9 76.841,61.9 76.9,61.959 76.9,62.441 76.959,62.5 78.2,62.5 78.275,62.425 78.275,62.125 v1(78.3,62.1)
eMMC_CMD: R722.1 R725.1 U703.M5 | length 32.1
  L1 (Sig) w0.1: R725.1@54.8,59.94 v1(54.8,62.1) ; v1(77.5,62.1) 77.8,61.8 U703.M5@77.8,61.6
  L6 (Sig) w0.1: v1(54.8,62.1) 72.938,62.1 72.988,62.1 73.046,62.159 73.046,62.329 73.061,62.344 73.331,62.344 73.346,62.329 73.346,62.099 73.361,62.084 73.631,62.084 73.646,62.099 73.646,62.329 73.661,62.344 73.931,62.344 73.946,62.329 73.946,62.099 73.961,62.084 74.231,62.084 74.246,62.099 74.246,62.329 74.261,62.344 74.531,62.344 74.546,62.329 74.546,62.099 74.561,62.084 74.831,62.084 74.846,62.099 74.846,62.297 74.861,62.312 75.131,62.312 75.146,62.297 75.146,62.159 75.205,62.1 75.5,62.1 v1(77.5,62.1)
  L8 (Sig) w0.1: R722.1@74.4,60.24 74.4,61.5 74.5,61.6 77.441,61.6 77.5,61.659 v1(77.5,62.1)
eMMC_DAT0: R726.1 R734.1 U703.A3 | length 33.8
  L1 (Sig) w0.1: R734.1@66.5,59.94 66.5,60.6 66.5,60.65 66.441,60.709 66.265,60.709 66.25,60.724 66.25,60.994 66.265,61.009 66.735,61.009 66.75,61.024 66.75,61.294 66.735,61.309 66.265,61.309 66.25,61.324 66.25,61.594 66.265,61.609 66.735,61.609 66.75,61.624 66.75,61.894 66.735,61.909 66.265,61.909 66.25,61.924 66.25,62.194 66.265,62.209 66.735,62.209 66.75,62.224 66.75,62.494 66.735,62.509 66.265,62.509 66.25,62.524 66.25,62.794 66.265,62.809 66.735,62.809 66.75,62.824 66.75,63.094 66.735,63.109 66.265,63.109 66.25,63.124 66.25,63.394 66.265,63.409 66.735,63.409 66.75,63.424 66.75,63.694 66.735,63.709 66.265,63.709 66.25,63.724 66.25,63.994 66.265,64.009 66.735,64.009 66.75,64.024 66.75,64.294 66.735,64.309 66.265,64.309 66.25,64.324 66.25,64.594 66.265,64.609 66.735,64.609 66.75,64.624 66.75,64.894 66.735,64.909 66.265,64.909 66.25,64.924 66.25,65.194 66.265,65.209 66.735,65.209 66.75,65.224 66.75,65.494 66.735,65.509 66.265,65.509 66.25,65.524 66.25,65.794 66.265,65.809 66.735,65.809 66.75,65.824 66.75,66.094 66.735,66.109 66.265,66.109 66.25,66.124 66.25,66.394 66.265,66.409 66.735,66.409 66.75,66.424 66.75,66.694 66.735,66.709 66.265,66.709 66.25,66.724 66.25,66.994 66.265,67.009 66.735,67.009 66.75,67.024 66.75,67.294 66.735,67.309 66.322,67.309 66.307,67.324 66.307,67.594 66.322,67.609 66.441,67.609 66.5,67.667 66.5,68.003 v1(66.5,68.2) ; U703.A3@76.8,67.1 v1(76.8,68.2)
  L6 (Sig) w0.1: v1(66.5,68.2) v1(76.8,68.2)
  L8 (Sig) w0.1: R726.1@75.2,69.96 75.22,69.94 75.22,68.38 75.4,68.2 v1(76.8,68.2)
eMMC_DAT1: R727.1 R735.1 U703.A4 | length 32.2
  L1 (Sig) w0.1: R735.1@65.2,59.94 65.2,62.9 65.2,62.95 65.141,63.009 64.965,63.009 64.95,63.024 64.95,63.294 64.965,63.309 65.435,63.309 65.45,63.324 65.45,63.594 65.435,63.609 64.965,63.609 64.95,63.624 64.95,63.894 64.965,63.909 65.435,63.909 65.45,63.924 65.45,64.194 65.435,64.209 64.965,64.209 64.95,64.224 64.95,64.494 64.965,64.509 65.435,64.509 65.45,64.524 65.45,64.794 65.435,64.809 64.965,64.809 64.95,64.824 64.95,65.094 64.965,65.109 65.435,65.109 65.45,65.124 65.45,65.394 65.435,65.409 64.965,65.409 64.95,65.424 64.95,65.694 64.965,65.709 65.435,65.709 65.45,65.724 65.45,65.994 65.435,66.009 64.965,66.009 64.95,66.024 64.95,66.294 64.965,66.309 65.435,66.309 65.45,66.324 65.45,66.594 65.435,66.609 64.965,66.609 64.95,66.624 64.95,66.894 64.965,66.909 65.435,66.909 65.45,66.924 65.45,67.194 65.435,67.209 64.965,67.209 64.95,67.224 64.95,67.494 64.965,67.509 65.435,67.509 65.45,67.524 65.45,67.794 65.435,67.809 65.084,67.809 65.069,67.824 65.069,68.094 65.084,68.109 65.141,68.109 65.2,68.168 65.2,68.296 v1(65.2,68.6) ; U703.A4@77.3,67.1 v1(77.3,68.6)
  L6 (Sig) w0.1: v1(65.2,68.6) v1(77.3,68.6)
  L8 (Sig) w0.1: R727.1@76.5,69.96 76.5,69.2 76.6,69.1 77.2,69.1 77.3,69 v1(77.3,68.6)
eMMC_DAT2: R728.1 R736.1 U703.A5 | length 30.7
  L1 (Sig) w0.1: R736.1@63.9,59.94 63.9,65.091 63.9,65.141 63.841,65.2 63.665,65.2 63.65,65.215 63.65,65.485 63.665,65.5 64.135,65.5 64.15,65.515 64.15,65.785 64.135,65.8 63.665,65.8 63.65,65.815 63.65,66.085 63.665,66.1 64.135,66.1 64.15,66.115 64.15,66.385 64.135,66.4 63.665,66.4 63.65,66.415 63.65,66.685 63.665,66.7 64.135,66.7 64.15,66.715 64.15,66.985 64.135,67 63.665,67 63.65,67.015 63.65,67.285 63.665,67.3 64.135,67.3 64.15,67.315 64.15,67.585 64.135,67.6 63.665,67.6 63.65,67.615 63.65,67.885 63.665,67.9 64.131,67.9 64.146,67.915 64.146,68.185 64.131,68.2 63.841,68.2 63.826,68.215 63.826,68.485 63.841,68.5 63.9,68.559 63.9,68.7 v1(63.9,69) ; U703.A5@77.8,67.1 v1(77.8,69)
  L6 (Sig) w0.1: v1(63.9,69) v1(77.8,69)
  L8 (Sig) w0.1: v1(77.8,69) R728.1@77.8,69.96
eMMC_DAT3: R729.1 R737.1 U703.B2 | length 31.2
  L1 (Sig) w0.1: R737.1@62.6,59.94 62.6,60.522 62.6,60.572 62.541,60.63 62.365,60.63 62.35,60.645 62.35,60.915 62.365,60.93 62.835,60.93 62.85,60.945 62.85,61.215 62.835,61.23 62.365,61.23 62.35,61.245 62.35,61.515 62.365,61.53 62.835,61.53 62.85,61.545 62.85,61.815 62.835,61.83 62.365,61.83 62.35,61.845 62.35,62.115 62.365,62.13 62.835,62.13 62.85,62.145 62.85,62.415 62.835,62.43 62.365,62.43 62.35,62.445 62.35,62.715 62.365,62.73 62.835,62.73 62.85,62.745 62.85,63.015 62.835,63.03 62.365,63.03 62.35,63.045 62.35,63.315 62.365,63.33 62.835,63.33 62.85,63.345 62.85,63.615 62.835,63.63 62.365,63.63 62.35,63.645 62.35,63.915 62.365,63.93 62.835,63.93 62.85,63.945 62.85,64.215 62.835,64.23 62.365,64.23 62.35,64.245 62.35,64.515 62.365,64.53 62.835,64.53 62.85,64.545 62.85,64.815 62.835,64.83 62.365,64.83 62.35,64.845 62.35,65.115 62.365,65.13 62.835,65.13 62.85,65.145 62.85,65.415 62.835,65.43 62.365,65.43 62.35,65.445 62.35,65.715 62.365,65.73 62.835,65.73 62.85,65.745 62.85,66.015 62.835,66.03 62.659,66.03 62.6,66.089 62.6,66.384 v1(62.6,66.6)
  L6 (Sig) w0.1: v1(62.6,66.6) 71.697,66.6 71.747,66.6 71.806,66.659 71.806,66.789 71.821,66.804 72.091,66.804 72.106,66.789 72.106,66.439 72.121,66.424 72.391,66.424 72.406,66.439 72.406,66.541 72.464,66.6 72.8,66.6 v1(76.3,66.6)
  L8 (Sig) w0.1: R729.1@74.84,66.4 75.04,66.6 v1(76.3,66.6)
eMMC_DAT4: R730.1 R738.1 U703.B3 | length 32.2
  L1 (Sig) w0.1: R738.1@61.3,59.94 61.3,60.416 61.3,60.466 61.241,60.524 61.065,60.524 61.05,60.539 61.05,60.809 61.065,60.824 61.535,60.824 61.55,60.839 61.55,61.109 61.535,61.124 61.065,61.124 61.05,61.139 61.05,61.409 61.065,61.424 61.535,61.424 61.55,61.439 61.55,61.709 61.535,61.724 61.065,61.724 61.05,61.739 61.05,62.009 61.065,62.024 61.535,62.024 61.55,62.039 61.55,62.309 61.535,62.324 61.065,62.324 61.05,62.339 61.05,62.609 61.065,62.624 61.535,62.624 61.55,62.639 61.55,62.909 61.535,62.924 61.065,62.924 61.05,62.939 61.05,63.209 61.065,63.224 61.535,63.224 61.55,63.239 61.55,63.509 61.535,63.524 61.065,63.524 61.05,63.539 61.05,63.809 61.065,63.824 61.535,63.824 61.55,63.839 61.55,64.109 61.535,64.124 61.065,64.124 61.05,64.139 61.05,64.409 61.065,64.424 61.535,64.424 61.55,64.439 61.55,64.709 61.535,64.724 61.126,64.724 61.111,64.739 61.111,65.009 61.126,65.024 61.241,65.024 61.3,65.083 61.3,65.3 v1(61.3,65.6)
  L6 (Sig) w0.1: v1(61.3,65.6) 76.7,65.6 76.8,65.7 v1(76.8,66.6)
  L8 (Sig) w0.1: R730.1@74.84,67.7 76.741,67.7 76.8,67.641 v1(76.8,66.6)
eMMC_DAT5: R731.1 R739.1 U703.B4 | length 34.7
  L1 (Sig) w0.1: R739.1@60,59.94 60,61.577 60,61.627 59.941,61.685 59.749,61.685 59.734,61.7 59.734,61.97 59.749,61.985 60.331,61.985 60.346,62 60.346,62.27 60.331,62.285 59.749,62.285 59.734,62.3 59.734,62.57 59.749,62.585 60.331,62.585 60.346,62.6 60.346,62.87 60.331,62.885 59.749,62.885 59.734,62.9 59.734,63.17 59.749,63.185 60.331,63.185 60.346,63.2 60.346,63.47 60.331,63.485 59.749,63.485 59.734,63.5 59.734,63.77 59.749,63.785 60.328,63.785 60.343,63.8 60.343,64.07 60.328,64.085 60.059,64.085 60,64.144 60,64.69 v1(60,65.1)
  L6 (Sig) w0.1: v1(60,65.1) 77.241,65.1 77.3,65.159 v1(77.3,66.6)
  L8 (Sig) w0.1: v1(77.3,66.6) 77.3,67.8 78.741,67.8 78.8,67.859 78.8,70.141 78.859,70.2 R731.1@79.86,70.2
eMMC_DAT6: R732.1 R740.1 U703.B5 | length 32.3
  L1 (Sig) w0.1: R740.1@58.7,59.94 58.7,62.201 58.7,62.251 58.641,62.31 58.465,62.31 58.45,62.325 58.45,62.595 58.465,62.61 58.935,62.61 58.95,62.625 58.95,62.895 58.935,62.91 58.465,62.91 58.45,62.925 58.45,63.195 58.465,63.21 58.935,63.21 58.95,63.225 58.95,63.495 58.935,63.51 58.465,63.51 58.45,63.525 58.45,63.795 58.465,63.81 58.641,63.81 58.7,63.868 58.7,64.1 v1(58.7,64.6)
  L6 (Sig) w0.1: v1(58.7,64.6) 77.7,64.6 77.8,64.7 v1(77.8,66.6)
  L8 (Sig) w0.1: v1(77.8,66.6) 77.8,67.441 77.859,67.5 79.041,67.5 79.1,67.559 79.1,68.841 79.159,68.9 R732.1@79.86,68.9
eMMC_DAT7: R733.1 R741.1 U703.B6 | length 30
  L1 (Sig) w0.1: R741.1@57.4,59.94 v1(57.4,64.1)
  L6 (Sig) w0.1: v1(57.4,64.1) 78.2,64.1 78.3,64.2 v1(78.3,66.6)
  L8 (Sig) w0.1: v1(78.3,66.6) 78.3,67.041 78.359,67.1 79.341,67.1 79.4,67.159 79.4,67.541 79.459,67.6 R733.1@79.86,67.6
eMMC_DS: R742.1 U703.H5 | length 3.8
  L1 (Sig) w0.1: v1(77.3,63.6) U703.H5@77.8,63.6
  L8 (Sig) w0.1: R742.1@74.575,63 76.041,63 76.1,63.059 76.1,63.541 76.159,63.6 v1(77.3,63.6)
eMMC_nRST: R721.1 R724.1 U703.K5 | length 7.7
  L1 (Sig) w0.1: v1(77.3,63) 77.35,63 77.75,62.6 U703.K5@77.8,62.6
  L8 (Sig) w0.1: v1(77.3,63) 77.368,63 77.468,62.9 78.6,62.9 78.8,62.7 78.8,61.559 78.859,61.5 80.5,61.5 ; R721.1@80.5,59.68 80.5,61.5 ; R724.1@81.26,61.5 80.5,61.5
eMMC_VDDIM: C709.2 U703.C2 | length 2.8
  L8 (Sig) w0.1: C709.2@74.675,64.9 76.241,64.9 76.3,64.959 v1(76.3,66.1)
ETH_nRESET: C807.2 R834.1 U800.19 U802.4 | length 21.6
  L1 (Sig) w0.1: R834.1@25.462,30.9 25.8,30.9 25.8,29.25 U802.4@25.95,29.25 26.8,29.25 ; v1(26.8,28.6) 26.8,29.25 ; v1(26.8,36.6) 26.8,29.25 ; U800.19@33.985,37.815 v1(34.7,37.815)
  L8 (Sig) w0.1: C807.2@25.9,28.6 v1(26.8,28.6) ; v1(26.8,36.6) 34.5,36.6 34.7,36.8 v1(34.7,37.815)
EXT_5V: CN300.1 R300.1
EXT_CLK_24MHZ: U400.V10 X500.3 | length 5.4
  L1 (Sig) w0.2: X500.3@56.3,55.2 57.8,55.2 57.9,55.1 U400.V10@57.9,51.3
EXT_CLK_32.768KHZ: U400.A6 X501.3 | length 2
  L1 (Sig) w0.1: X501.3@60.95,35.75 61.1,35.9 U400.A6@61.1,37.7
EXT_UART0_RX: CN1002.3 R900.1 R904.2
EXT_UART0_TX: CN1002.2 R903.2
GNDADC: C502.2 C503.2 C504.2 FB400.2 R545.2 U400.E8 | length 10.3
  L1 (Sig) w0.1: v1(59.1,37.3) 59.1,40.5 U400.E8@59.5,40.9
  L8 (Sig) w0.2: 57.82,36.3 58.02,36.1 59.308,36.1 59.425,36.217 R545.2@59.425,36.7 59.425,36.975 v1(59.1,37.3)
  L8 (Sig) w0.3: FB400.2@57.4,33.5 57.82,33.5 C502.2@57.82,35.1 C503.2@57.82,35.9 57.82,36.3 C504.2@57.82,36.7
GNDOSC0: C501.1 R400.1 U400.V11 X500.2 | length 4.7
  L1 (Sig) w0.2: v2(56.24,53.9) 56.983,53.9 57.1,53.783 U400.V11@57.1,51.3
  L8 (Sig) w0.2: R400.1@56.12,54.02 v2(56.24,53.9)
  L8 (Sig) w0.3: R400.1@56.12,54.02 C501.1@56.12,55.2
GNDOSC1: C505.1 R401.2 U400.A5 X501.2 | length 6.9
  L1 (Sig) w0.5: v1(61.1,32.9) v1(61.1,34)
  L8 (Sig) w0.3: C505.1@59,34.79 60.996,34.79 61.086,34.7 v1(61.1,34.7) 61.1,37.524 61.276,37.7 v1(61.9,37.7)
GNDPWR: C1000.2 CN300.2 CN300.3 R309.1 R1056.2
  other v1: 7.5,66 9,66 7.5,67.5 9,67.5 7.5,68.75 9,68.75
GPIO0_20: R915.1 U400.D14 | length 11.9
  L1 (Sig) w0.1: U400.D14@54.7,40.1 55.1,39.7 v1(55.1,32.2)
  L8 (Sig) w0.1: R915.1@52.15,31.3 52.15,32.131 52.219,32.2 v1(55.1,32.2)
GPIO1_16: R723.2 U400.R13
GPIO2_0: R723.1 U400.T13
GPIO3_20: R915.2 U400.D13 | length 10.9
  L4 (Sig) w0.1: v1(55.5,31.3) v1(55.5,40.1)
  L8 (Sig) w0.1: R915.2@53.45,31.3 v1(55.5,31.3)
IN5VS: C300.2 C313.2 C314.2 C315.2 CN1001.1 CN1001.2 CN1001.3 CN1001.4 CN1001.5 CN1001.6 CN1001.7 CN1001.8 D300.1 LED300.4 R300.2 R302.2 R305.1 U300.10 | length 22.5
  L1 (Sig) w1: R300.2@18,69.5 C300.2@18,72.45
  L8 (Sig) w0.2: D300.1@11.22,33.9 R305.1@13.15,33.9
  L8 (Sig) w0.4: v2(35.39,76.5) 35.395,76.495 35.395,74.305 CN1001.2@35.4,74.3 ; v2(35.4,77.5) CN1001.1@35.4,79.7 ; v2(36.19,77.5) 36.195,77.505 36.195,79.695 CN1001.3@36.2,79.7 ; CN1001.4@36.2,74.3 v2(36.2,76.5) ; CN1001.6@37,74.3 v2(37,76.5) ; v2(37,77.5) CN1001.5@37,79.7 ; CN1001.8@37.8,74.3 v2(37.8,76.5) ; v2(37.8,77.5) CN1001.7@37.8,79.7
  other v1: 33.15,67.6 33.15,68.3
LDO_A_ADJ: C312.2 R326.1 R333.2 U302.4 | length 6.4
  L8 (Sig) w0.5: C312.2@21.725,11.1 U302.4@21.725,12.895 23.7,12.895 R326.1@23.7,12.85 R333.2@26.3,12.85
LDO_MIC_EN: R335.1 U302.1 | length 10.8
  L1 (Sig) w0.2: v2(17.2,11.1) 18.383,11.1 18.5,11.217 v2(18.5,16.7)
  L8 (Sig) w0.2: R335.1@16.45,11.1 v2(17.2,11.1) ; v2(18.5,16.7) 18.503,16.702 21.723,16.702 U302.1@21.725,16.705
MICRO_SD_CLK: CN700.5 R704.1 R710.2 | length 123.4
  L1 (Sig) w0.1: v1(44.7,33.9) R710.2@44.7,34.36
  L6 (Sig) w0.1: v1(44.7,33.9) 44.7,33.5 44.7,33.398 44.759,33.339 44.886,33.339 44.901,33.324 44.901,33.054 44.886,33.039 44.465,33.039 44.45,33.024 44.45,32.754 44.465,32.739 44.641,32.739 44.7,32.681 44.7,32.631 44.7,19.4 44.8,19.3 103.641,19.3 103.7,19.359 v1(103.7,64.6)
  L8 (Sig) w0.1: v1(103.7,64.6) v1(107.06,64.6)
MICRO_SD_CMD: CN700.3 R705.1 R712.2 | length 123.6
  L1 (Sig) w0.1: v1(43.4,33.9) R712.2@43.4,34.36
  L6 (Sig) w0.1: v1(43.4,33.9) 43.4,33.5 43.4,33.28 43.341,33.222 43.326,33.207 43.326,32.937 43.341,32.922 43.634,32.922 43.649,32.907 43.649,32.637 43.634,32.622 43.165,32.622 43.15,32.607 43.15,32.337 43.165,32.322 43.341,32.322 43.4,32.263 43.4,32.213 43.4,19.1 43.5,19 104.041,19 104.1,19.059 v1(104.1,62.4)
  L8 (Sig) w0.1: v1(104.1,62.4) 105.223,62.4 CN700.3@105.224,62.399 106.559,62.399 v1(107.06,62.9)
MICRO_SD_DAT0: CN700.7 R706.1 R713.2 | length 123.7
  L1 (Sig) w0.1: v1(46,33.9) R713.2@46,34.36
  L6 (Sig) w0.1: v1(46,33.9) 46,33.741 46,33.566 46.059,33.508 46.155,33.508 46.17,33.493 46.17,33.223 46.155,33.208 45.845,33.208 45.83,33.193 45.83,32.923 45.845,32.908 45.941,32.908 46,32.849 46,32.799 46,19.7 46.1,19.6 103.241,19.6 103.3,19.659 v1(103.3,66.8)
  L8 (Sig) w0.1: v1(103.3,66.8) 106.2,66.8 106.7,66.3 v1(107.06,66.3)
MICRO_SD_DAT1: CN700.8 R707.1 R714.2 | length 123.6
  L1 (Sig) w0.1: v1(47.3,33.9) R714.2@47.3,34.36
  L6 (Sig) w0.1: v1(47.3,33.9) 47.3,33.525 47.3,33.154 47.241,33.096 47.045,33.096 47.03,33.081 47.03,32.811 47.045,32.796 47.461,32.796 47.476,32.781 47.476,32.511 47.461,32.496 46.991,32.496 46.976,32.481 46.976,32.211 46.991,32.196 47.241,32.196 47.3,32.137 47.3,32.087 47.3,19.959 47.359,19.9 102.841,19.9 102.9,19.959 v1(102.9,67.906)
  L8 (Sig) w0.1: v1(102.9,67.906) 105.217,67.906 CN700.8@105.224,67.899 v1(107.06,67.899)
MICRO_SD_DAT2: CN700.1 R708.1 R715.2 | length 123.9
  L1 (Sig) w0.1: v1(48.6,33.9) R715.2@48.6,34.36
  L6 (Sig) w0.1: v1(48.6,33.9) 48.6,33.5 48.6,33.193 48.659,33.134 48.674,33.119 48.674,32.849 48.659,32.834 48.393,32.834 48.378,32.819 48.378,32.549 48.393,32.534 48.835,32.534 48.85,32.519 48.85,32.249 48.835,32.234 48.365,32.234 48.35,32.219 48.35,31.949 48.365,31.934 48.835,31.934 48.85,31.919 48.85,31.649 48.835,31.634 48.365,31.634 48.35,31.619 48.35,31.349 48.365,31.334 48.835,31.334 48.85,31.319 48.85,31.049 48.835,31.034 48.365,31.034 48.35,31.019 48.35,30.749 48.365,30.734 48.835,30.734 48.85,30.719 48.85,30.449 48.835,30.434 48.365,30.434 48.35,30.419 48.35,30.149 48.365,30.134 48.835,30.134 48.85,30.119 48.85,29.849 48.835,29.834 48.365,29.834 48.35,29.819 48.35,29.549 48.365,29.534 48.835,29.534 48.85,29.519 48.85,29.249 48.835,29.234 48.365,29.234 48.35,29.219 48.35,28.949 48.365,28.934 48.835,28.934 48.85,28.919 48.85,28.649 48.835,28.634 48.365,28.634 48.35,28.619 48.35,28.349 48.365,28.334 48.835,28.334 48.85,28.319 48.85,28.049 48.835,28.034 48.365,28.034 48.35,28.019 48.35,27.749 48.365,27.734 48.835,27.734 48.85,27.719 48.85,27.449 48.835,27.434 48.365,27.434 48.35,27.419 48.35,27.149 48.365,27.134 48.835,27.134 48.85,27.119 48.85,26.849 48.835,26.834 48.365,26.834 48.35,26.819 48.35,26.549 48.365,26.534 48.835,26.534 48.85,26.519 48.85,26.249 48.835,26.234 48.365,26.234 48.35,26.219 48.35,25.949 48.365,25.934 48.541,25.934 48.6,25.876 48.6,25.826 48.6,20.259 48.659,20.2 102.441,20.2 102.5,20.259 v1(102.5,60.2)
  L8 (Sig) w0.1: v1(102.5,60.2) 105.223,60.2 CN700.1@105.224,60.199 106.461,60.199 v1(107.06,59.6)